# Altium PCB Supply_core_PCB.PcbDoc
Units mm, origin at the board's own origin, x right, y up, seen from the top; angles counter-clockwise.
Board outline 38.1 x 22.86 mm, 2 copper layers (Top Layer, Bottom Layer), stack 1.071 mm thick; 28 components, 82 nets, 91 pads, 20 vias.
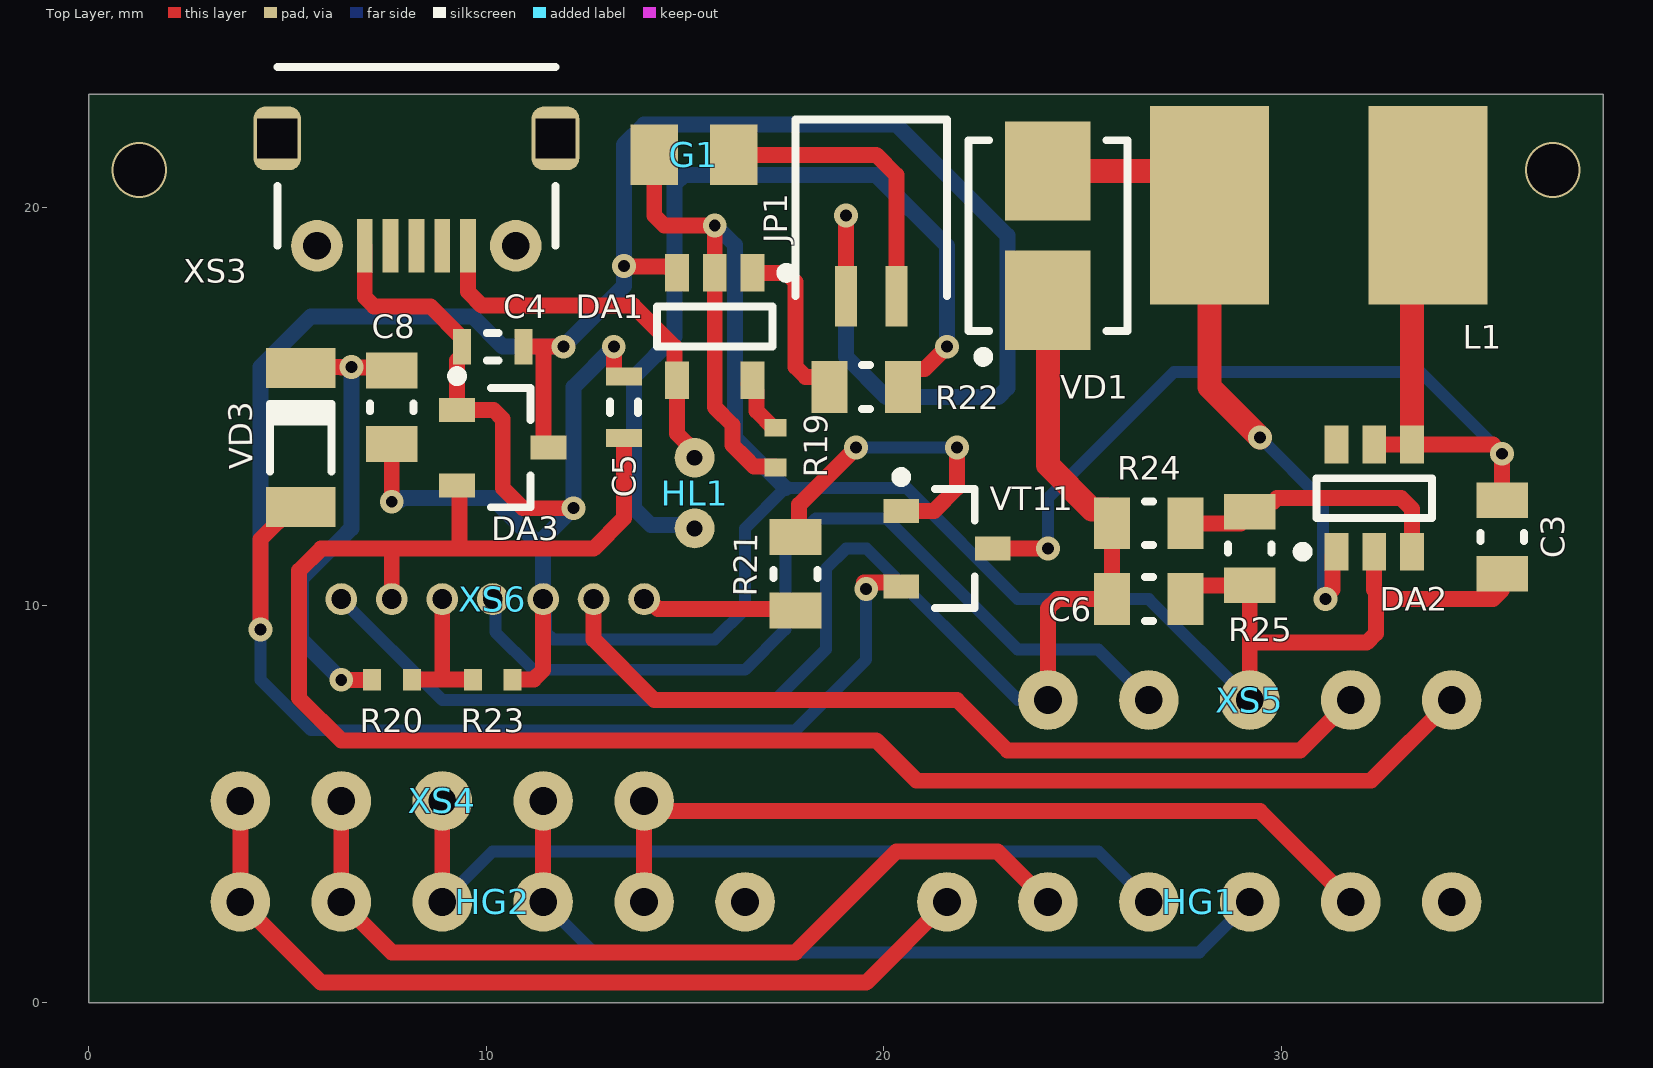
[diagram p0: Top Layer view]
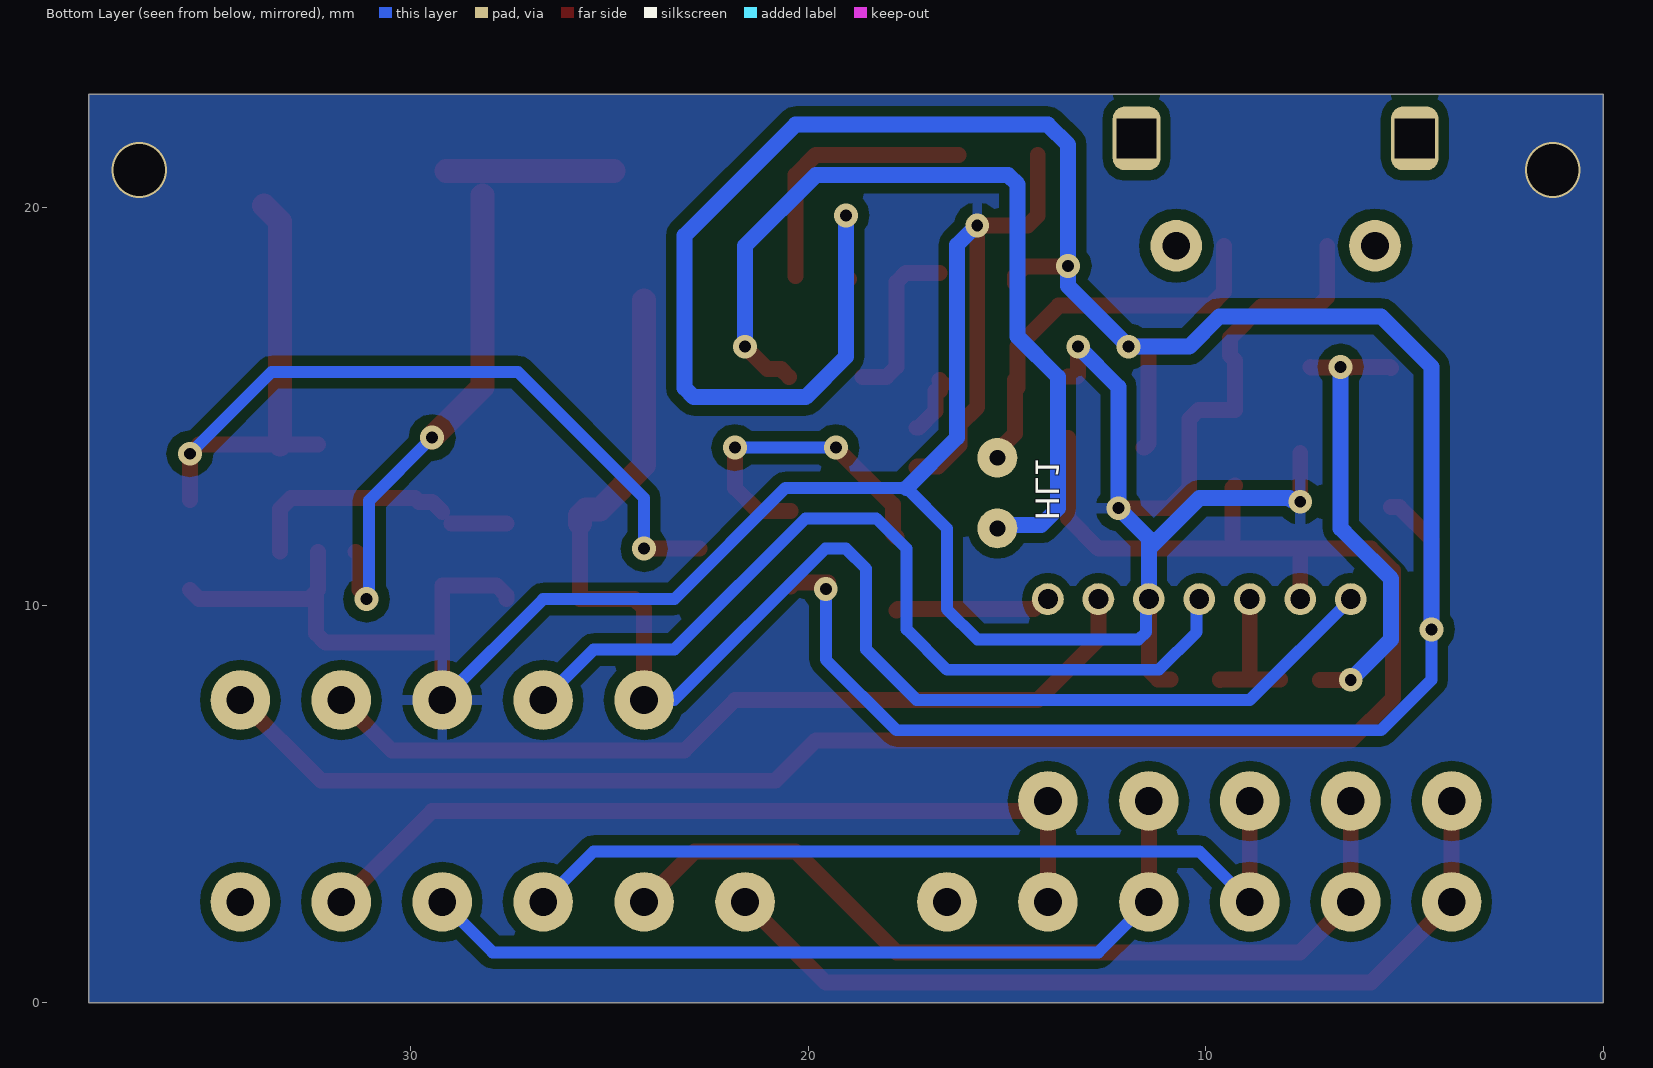
[diagram p1: Bottom Layer view, seen from below]

## Layer stack, top to bottom
Top Solder: solder mask 0.0102, Solder Resist, Dk 3.5
Top Layer: signal copper 0.0356
Dielectric 1: dielectric 1, FR-4, Dk 4.8
Bottom Layer: signal copper 0.0356
Bottom Solder: solder mask 0.0102, Solder Resist, Dk 3.5

## Board outline
0,0 38.1,0 38.1,22.86 0,22.86
cut-out: -25.4,-48.26 -25.146,-48.26 -25.146,-48.006 -25.4,-48.006
cut-out: -25.4,-48.26 -25.146,-48.26 -25.146,-48.006 -25.4,-48.006
cut-out: -25.4,-48.26 -25.146,-48.26 -25.146,-48.006 -25.4,-48.006

## Design rules (kind name [scope] priority, off if disabled: settings)
Clearance [All] p1: gap=0.254 ignorepadtopadclearanceinfootprint=FALSE
FanoutControl Fanout_LCC [All] p1 off: bgadir=Out bgaviamode=Centered fanoutstyle=Auto fanoutdirection=Alternating viagrid=0.025 // Protel DXP Scope 1 Expression Was: IsLCC   Fanout_LCC (Default Rule)
FanoutControl Fanout_BGA [All] p2 off: bgadir=Out bgaviamode=Centered fanoutstyle=Auto fanoutdirection=Alternating viagrid=0.025 // Protel DXP Scope 1 Expression Was: IsBGA   Fanout_BGA (Default Rule)
FanoutControl Fanout_SOIC [All] p3 off: bgadir=Out bgaviamode=Centered fanoutstyle=Auto fanoutdirection=Alternating viagrid=0.025 // Protel DXP Scope 1 Expression Was: IsSOIC   Fanout_SOIC (Default Rule)
FanoutControl Fanout_Default [All] p4: bgadir=Out bgaviamode=Centered fanoutstyle=Auto fanoutdirection=Alternating viagrid=0.025 // Fanout_Default (Default Rule)
FanoutControl Fanout_Small [All] p5 off: bgadir=Out bgaviamode=Centered fanoutstyle=Auto fanoutdirection=Alternating viagrid=0.025 // Protel DXP Scope 1 Expression Was: (CompPinCount < 5)   Fanout_Small (Default Rule)
PolygonConnect [All] p1: connectstyle=Relief reliefconductorwidth=0.254 reliefentries=4 polygonreliefangle="90 Angle" airgapwidth=0.254
RoutingVias [All] p1: holewidth=0.711 width=1.27 viastyle="Through Hole" minholewidth=0.711 minwidth=1.27 maxholewidth=0.711 maxwidth=1.27
SilkToSolderMaskClearance [All] p1 off: minsilkscreentomaskgap=0.254 clearancetoexposedcopper=TRUE // Protel DXP Scope 1 Expression Was: IsPad
SolderMaskExpansion [All] p1: expansion=0.102 istentingtop=FALSE
Width [All] p1: maxlimit=1 minlimit=0.15 preferedwidth=0.4
24 further rules are at their usual default settings.

## Components (designator, comment, footprint, x,y, rotation, side; value= is the part's Value field where it differs from the comment)
C3 "C0805" CHIP-0805 35.56,11.72 r90 top
C4 "C0805" CHIP-0603 10.16,16.51 r0 top
C5 "C0805" CHIP-0603 13.462,14.986 r270 top
C6 "C0805" CHIP-0805 26.67,10.16 r180 top
C8 "C0805" CHIP-0805 7.62,14.986 r90 top
DA1 "LTC4054" SOT23-5 15.748,17.018 r270 top
DA2 "SX1308" SOT23-6 32.34,12.7 r90 top
DA3 "XC6206" SOT23-3 10.414,13.97 r0 top
G1 "Battery" BATTERY 16.224,21.336 r180 top
HG1 "HDSP-2000_Colums" HDSP-2000_COL 21.59,2.54 r0 top
HG2 "HDSP-2000_Colums" HDSP-2000_COL 3.81,2.54 r0 top
HL1 "LED" LED_1 15.24,11.176 r90 top
JP1 "Jamper" JAMPER 20.32,17.78 r180 top
L1 "L" L_SMD 33.694,20.066 r180 top
R19 "R0805" CHIP-0402 17.272,13.97 r90 top
R20 "R0805" CHIP-0402 7.628,8.128 r0 top
R21 "R0805" CHIP-0805 17.78,10.795 r90 top
R22 "R0805" CHIP-0805 19.558,15.494 r180 top
R23 "R0805" CHIP-0402 10.16,8.128 r0 top
R24 "R0805" CHIP-0805 26.67,12.065 r180 top
R25 "R0805" CHIP-0805 29.21,11.43 r90 top
VD1 "SS34" DIOD 24.13,19.304 r90 top
VD3 "BAS85" DIOD_MELF 5.334,14.224 r270 top
VT11 "AO3401A" SOT23-3 21.59,11.43 r0 top
XS3 "Micro_USB" Micro_USB 8.24,19.05 r180 top
XS4 "Socket" SOCKET 3.81,5.08 r0 top
XS5 "Socket" SOCKET 24.13,7.62 r0 top
XS6 "Socket_7" SOCKET_7 6.35,10.16 r0 top

## Footprints (in the part's own frame and the unit in brackets; to place one, negate y for a bottom-side part, rotate by r counter-clockwise, add the part's x,y. Pads: shape width x height; smd on the part's side, far side on the other; paste and mask are expansions set on the pad)
BATTERY [mm]
  rect 1.2x1.524 smd: 1(0,0) 2(2,0)
CHIP-0402 [mm] "Chip Resistor, 2-Leads, Body 1,00x0,50mm, IPC Medium Density"
  rect 0.45x0.55 smd: 1(-0.5,0) 2(0.5,0)
  body extent -0.5,-0.25 0.5,0.25, height 0.35
CHIP-0603 [mm] "Chip Capacitor, 2-Leads, Body 1,55x0,85mm, IPC Medium Density"
  rect 0.45x0.9 smd: 1(-0.775,0) 2(0.775,0)
  silkscreen extent -0.15,-0.35 0.15,0.35, body extent -0.77,-0.43 0.77,0.42, height 0.35
CHIP-0805 [mm] "Chip Resistor, 2-Leads, Body 2,00x1,25mm, IPC Medium Density"
  rect 0.9x1.3 smd: 1(-0.925,0) 2(0.925,0)
  silkscreen extent -0.1,-0.55 0.1,0.55, body extent -1,-0.63 1,0.63, height 0.7
DIOD [mm] "Molded Diode, 2-Leads, Body 4,40x3,63mm, IPC Medium Density"
  rect 2.5x2.15 smd: 1(-1.625,0) 2(1.625,0)
  silkscreen extent -3.17,-2 2.4,2, body extent -2.38,-1.97 2.37,1.97, height 2.6
DIOD_MELF [mm] "MELF Diode, 2-Leads, Body 3,50x1,53mm, IPC Medium Density"
  rect 1x1.75 smd: 1(-1.75,0) 2(1.75,0)
  silkscreen extent -0.85,-0.77 0.85,0.78, body extent -1.85,-0.8 1.85,0.8, height 1.59
HDSP-2000_COL [mm]
  round 1.5 hole 0.7: 1(0,0) 2(2.54,0) 3(5.08,0) 4(7.62,0) 5(10.16,0) 6(12.7,0)
JAMPER [mm]
  rect 0.55x1.524 smd: 1(0,0) 2(1.27,0)
  silkscreen extent -1.27,-4.44 2.54,0
L_SMD [mm]
  rect 3x5 smd: 1(0,0) 2(5.5,0)
LED_1 [mm]
  round 1 hole 0.4: 1(0.762,0) 2(2.54,0)
Micro_USB [mm]
  rect 0.4x1.35 smd: 1(-1.3,0) 2(-0.65,0) 3(0,0) 4(0.65,0) 5(1.3,0)
  round 1.3 hole 0.7: 6(-2.5,0) 7(2.5,0)
  rrect50% 1.2x1.6 hole 1 square: 8(-3.5,-2.7) 9(3.5,-2.7)
  silkscreen extent -3.5,-4.5 3.5,0
SOCKET [mm]
  round 1.5 hole 0.7: 1(0,0) 2(2.54,0) 3(5.08,0) 4(7.62,0) 5(10.16,0)
SOCKET_7 [mm]
  round 0.8 hole 0.5: 1(0,0) 2(1.27,0) 3(2.54,0) 4(3.81,0) 5(5.08,0) 6(6.35,0) 7(7.62,0)
SOT23-3 [mm] "SOT23, 3-Leads, Body 2,90x2,30mm, Pitch 0,95mm, IPC Medium Density"
  rect 0.9x0.6 smd: 1(-1.15,0.95) 2(-1.15,-0.95) 3(1.15,0)
  silkscreen extent -1.27,-1.5 0.7,1.92, body extent -0.7,-1.5 0.7,1.5, height 1.1
SOT23-5 [mm] "SOT23, 5-Leads, Body 2,85x2,80mm, Pitch 0,95mm, IPC Medium Density"
  rect 0.95x0.6 smd: 1(-1.35,0.95) 2(-1.35,0) 3(-1.35,-0.95) 4(1.35,-0.95) 5(1.35,0.95)
  silkscreen extent -1.47,-1.45 0.5,1.93, body extent -0.87,-1.45 0.87,1.45, height 1.1
SOT23-6 [mm] "SOT23, 6-Leads, Body 2,85x2,80mm, Pitch 0,95mm, IPC Medium Density"
  rect 0.95x0.6 smd: 1(-1.35,0.95) 2(-1.35,0) 3(-1.35,-0.95) 4(1.35,-0.95) 5(1.35,0) 6(1.35,0.95)
  silkscreen extent -1.47,-1.45 0.5,1.92, body extent -0.87,-1.45 0.87,1.45, height 1.1

## Via types
v1: diameter 0.6, hole 0.3, Top Layer to Bottom Layer, 18 vias
v2: diameter 1.4, hole 1.3, Top Layer to Bottom Layer, 2 vias

## Nets (pads, with @x,y where several pads share a name; then routed paths per layer and width w, separated by ;. In a path a pad name is that pad's centre, name@x,y a point inside that pad or via, vN(x,y) a via of type N, cw(c..) or ccw(c..) an arc to the next point about the centre after c; other vN are vias at no path point)
+3V3: 
+3V3_D: 
+3V3_S: C5.2 DA3.2 XS5.5 XS6.2 | length 47.5
  Top Layer w0.4: XS6.2 7.62,11.43 ; DA3.2 9.324,12.96 9.324,11.43 ; C5.2 13.462,12.192 12.7,11.43 9.324,11.43 ; XS5.5 32.258,5.588 20.828,5.588 19.812,6.604 6.35,6.604 5.287,7.667 5.287,10.875 5.842,11.43 7.62,11.43 ; 7.62,11.43 9.324,11.43
+5: 
+5_D: 
+5_S: C6.2 R24.2 VD1.1 XS5.1 XS6.1 | length 35.8
  Top Layer w0.4: XS5.1 24.13,9.926 24.364,10.16 C6.2 R24.2@25.745,12.265
  Top Layer w0.6: VD1.1 24.13,13.528 25.243,12.415 25.595,12.415 25.745,12.265 R24.2
  Bottom Layer w0.3: XS6.1 8.89,7.62 17.272,7.62 18.542,8.89 18.542,10.922 19.05,11.43 19.573,11.43 23.383,7.62 XS5.1
ADC_IN: 
BAT_DIV: R20.2 R23.1 XS6.3 | length 3.5
  Top Layer w0.4: R20.2@8.128,8.141 8.89,8.141 ; XS6.3 8.89,8.141 ; R23.1@9.635,8.128 9.635,8.141 8.89,8.141
BAT_IN: 
BATTERY: C4.2 DA1.3 DA3.3 JP1.2 VD3.2 VT11.2 | length 74.8
  Top Layer w0.4: v1(4.318,9.398) 4.318,11.666 5.126,12.474 VD3.2 ; C4.2 11.436,16.51 ; DA3.3 11.536,13.97 11.436,14.07 11.436,16.51 ; v1(11.938,16.51) 11.436,16.51 ; v1(13.462,18.542) 13.479,18.525 14.562,18.525 14.798,18.289 DA1.3@14.798,18.114 ; JP1.2@18.975,18.213 19.05,18.288 v1(19.05,19.812) ; v1@19.499,10.58 20.34,10.58 VT11.2
  Bottom Layer w0.3: v1(4.318,9.398) 4.318,8.128 5.588,6.858 17.78,6.858 19.558,8.636 v1(19.558,10.414)
  Bottom Layer w0.4: v1(4.318,9.398) 4.318,16.002 5.588,17.272 9.652,17.272 10.414,16.51 v1(11.938,16.51) 13.462,18.034 v1(13.462,18.542) 13.462,21.59 13.97,22.098 20.32,22.098 23.114,19.304 23.114,15.474 22.88,15.24 20.066,15.24 19.05,16.256 v1(19.05,19.812)
Buttons: 
BYTE: 
CLK: 
CLK_BUS: 
CLK_PROG: 
Col1: 
Col2: 
Col3: 
Col4: 
Col5: 
D_OUT: 
DATA: 
GATE: 
Gate1: 
Gate2: 
Gate3: 
Gate4: 
Gate5: 
GATE_S: R21.1 XS6.7 | length 3.9
  Top Layer w0.4: XS6.7 14.068,10.16 14.322,9.906 17.744,9.906 R21.1
GND: 
GND_D: 
GND_S: C3.1 C4.1 C5.1 C6.1 C8.1 DA1.2 DA2.2 DA3.1 G1.2 R19.1 R23.2 R25.1 XS3.5 XS5.3 XS6.5 | length 81.7
  Top Layer w0.4: XS3.5 6.94,17.76 7.174,17.526 8.594,17.526 9.385,16.735 C4.1 9.385,16.285 9.264,16.164 DA3.1 10.18,14.92 10.414,14.686 10.414,12.954 10.922,12.446 v1(12.192,12.446) ; v1(7.62,12.609) C8.1@7.62,13.833 ; R23.2@10.881,8.141 11.196,8.141 11.43,8.375 XS6.5 XS6.5@11.499,10.229 ; v1(13.208,16.51) 13.212,16.506 13.212,15.786 13.237,15.761 C5.1 ; G1.2 14.224,19.812 14.478,19.558 v1(15.748,19.558) DA1.2 15.748,14.986 16.194,14.54 16.194,14.032 16.511,13.715 16.731,13.495 17.247,13.495 R19.1 ; C6.1 27.595,10.255 27.845,10.505 R25.1 29.21,9.063 ; XS5.3 29.21,9.063 ; DA2.2 32.34,10.394 32.385,10.349 ; C3.1@35.56,10.394 35.326,10.16 32.574,10.16 32.385,10.349 ; 29.21,9.063 32.151,9.063 32.385,9.297 32.385,10.349
  Bottom Layer w0.3: XS6.5 11.499,10.091 11.499,9.329 11.684,9.144 15.748,9.144 16.51,9.906 16.51,11.938 17.526,12.954 20.574,12.954 23.368,10.16 26.67,10.16 XS5.3
  Bottom Layer w0.4: v1(7.62,12.609) 7.668,12.657 7.845,12.657 7.888,12.7 10.16,12.7 11.43,11.43 ; XS6.5 11.43,11.43 ; v1(13.208,16.51) 12.192,15.494 v1(12.192,12.446) 11.43,11.684 11.43,11.43 ; v1(15.748,19.558) 15.768,19.558 16.256,19.07 16.256,14.224 17.526,12.954
  other v2: 1.27,20.955 36.83,20.955
HCLK: 
MISO_PROG: 
MOSI_PROG: 
NetC1_2: 
NetC2_2: 
NetC3_2: C3.2 DA2.4 DA2.5 L1.1 VT11.3 | length 26.9
  Top Layer w0.4: VT11.3 v1(24.13,11.43) ; DA2.5 DA2.4 35.326,14.05 v1(35.56,13.816) C3.2
  Top Layer w0.6: DA2.4 33.29,19.662 L1.1
  Bottom Layer w0.3: v1(24.13,11.43) 24.13,12.7 27.305,15.875 33.501,15.875 v1(35.56,13.816)
NetC7_1: 
NetC8_2: C8.2 R20.1 VD3.1 | length 11.9
  Top Layer w0.4: VD3.1 5.362,16.002 v1(6.604,16.002) ; v1(6.35,8.128) R20.1 ; v1@6.35,15.988 7.352,15.988 C8.2@7.366,16.002
  Bottom Layer w0.4: 6.33,11.664 5.334,10.668 5.334,9.144 v1(6.35,8.128) ; 6.33,11.664 6.604,11.938 v1(6.604,16.002)
NetDA1_1: DA1.1 R22.2 | length 4.3
  Top Layer w0.4: DA1.1 17.546,18.368 17.78,18.134 17.78,16.002 18.034,15.748 R22.2@18.633,15.748
NetDA1_4: DA1.4 HL1.2 XS3.1 | length 10.1
  Top Layer w0.4: XS3.1 9.54,17.892 9.889,17.543 13.699,17.543 14.732,16.51 DA1.4@14.732,15.48 ; DA1.4 14.798,15.414 14.798,14.32 15.24,13.878 HL1.2 HL1.2@15.244,13.72
NetDA1_5: DA1.5 R19.2 | length 1.6
  Top Layer w0.4: DA1.5@16.686,15.402 DA1.5@16.698,15.414 ; DA1.5 16.598,15.568 16.623,15.568 16.798,15.393 16.798,14.894 17.222,14.47 R19.2
NetDA2_1: DA2.1 L1.2 VD1.2 | length 16.9
  Top Layer w0.4: v1(31.115,10.16) 31.115,10.228 31.29,10.403 31.29,11.25 DA2.1
  Top Layer w0.6: VD1.2@24.892,20.929 L1.2@29.108,20.929 ; L1.2@28.194,20.32 L1.2 28.194,15.494 v1(29.464,14.224)
  Bottom Layer w0.3: v1@29.47,14.218 31.048,12.64 v1@31.048,10.16
NetDA2_3: DA2.3 R24.1 R25.2 | length 6.8
  Top Layer w0.4: R24.1 R25.2@28.982,12.065 ; R25.2 29.46,12.605 29.799,12.605 29.894,12.7 33.02,12.7 33.29,12.43 DA2.3
NetDD1_4: 
NetDD1_5: 
NetDD1_6: 
NetDD4_1: 
NetDD4_2: 
NetDD7_5: 
NetDD7_6: 
NetDD7_7: 
NetDD8_9: 
NetG1_1: G1.1 JP1.1 | length 6.8
  Top Layer w0.4: G1.1 19.812,21.336 20.32,20.828 JP1.1@20.32,18.288
NetHG1_1: HG1.1 HG2.1 XS4.1 | length 22
  Top Layer w0.4: XS4.1 HG2.1 5.842,0.508 19.558,0.508 HG1.1
NetHG1_2: HG1.2 HG2.2 XS4.2 | length 22.4
  Top Layer w0.4: XS4.2 HG2.2 7.62,1.27 17.78,1.27 20.32,3.81 22.86,3.81 HG1.2
NetHG1_3: HG1.3 HG2.3 XS4.3 | length 21.4
  Top Layer w0.4: HG2.3 XS4.3
  Bottom Layer w0.3: HG2.3 10.16,3.81 25.4,3.81 HG1.3
NetHG1_4: HG1.4 HG2.4 XS4.4 | length 21.4
  Top Layer w0.4: HG2.4 XS4.4
  Bottom Layer w0.3: HG2.4 12.7,1.27 27.94,1.27 HG1.4
NetHG1_5: HG1.5 HG2.5 XS4.5 | length 21.4
  Top Layer w0.4: HG2.5 XS4.5 14.131,4.919 14.531,4.919 14.624,4.826 29.464,4.826 HG1.5
NetHL1_1: HL1.1 R22.1 | length 22
  Top Layer w0.4: R22.1@20.483,15.748 20.679,15.944 21.024,15.944 v1(21.59,16.51)
  Bottom Layer w0.4: HL1.1 15.156,12.022 14.14,12.022 13.716,12.446 13.716,15.748 14.732,16.764 14.732,20.594 14.966,20.828 19.812,20.828 21.59,19.05 v1(21.59,16.51)
NetR1_1: 
NetR3_2: 
NetR6_1: 
NetR7_2: 
NetR9_1: 
NetR10_2: 
NetR13_1: 
NetR14_2: 
NetR16_1: 
NetR17_2: 
NetR21_2: R21.2 VT11.1 | length 8.1
  Top Layer w0.4: R21.2 17.87,11.81 17.87,12.536 v1(19.304,13.97) ; VT11.1 21.27,12.38 21.844,12.954 v1(21.844,13.97)
  Bottom Layer w0.3: v1(19.304,13.97) v1(21.844,13.97)
NetR27_1: 
NetXS5_2: XS5.2 XS6.4 | length 22.4
  Bottom Layer w0.3: XS6.4 10.229,10.091 10.229,9.329 11.176,8.382 16.51,8.382 17.526,9.398 17.526,11.43 18.288,12.192 20.066,12.192 23.368,8.89 25.4,8.89 XS5.2
NetXS5_4: XS5.4 XS6.6 | length 21.7
  Top Layer w0.4: XS6.6 12.7,9.144 14.224,7.62 21.844,7.62 23.114,6.35 30.48,6.35 XS5.4
PWM: 
PWM_D: 
RESET: 
SCL: 
SCLK: 
SDA: 
SWITCH: 
pads on no net: DA2.6 HG1.6 HG2.6 XS3.2 XS3.3 XS3.4 XS3.6 XS3.7 XS3.8 XS3.9

## Polygon pours and split planes (outlines as drawn)
GND_S on Bottom Layer "GND_S_L02_P000" (solid, remove dead copper, pour order 0): 0,22.86 0,0 38.1,0 38.1,22.86

## Silkscreen, mask and mechanical layers (free items; w line width, h text height)
Mechanical 15:
  lines w0.2: 0,8.89 3.81,8.89 3.81,22.86 ; 0,0 0,22.86 38.1,22.86 38.1,0 0,0